# Altium PCB ignore_testboard.PcbDoc (part 1 of 2)
Units mm, origin at the board's own origin, x right, y up, seen from the top; angles counter-clockwise.
Board outline 90 x 50 mm, 2 copper layers (Top Layer, Bottom Layer); 147 components, 148 nets, 497 pads, 0 vias.
Unrouted connection lines stored in the file: 235.
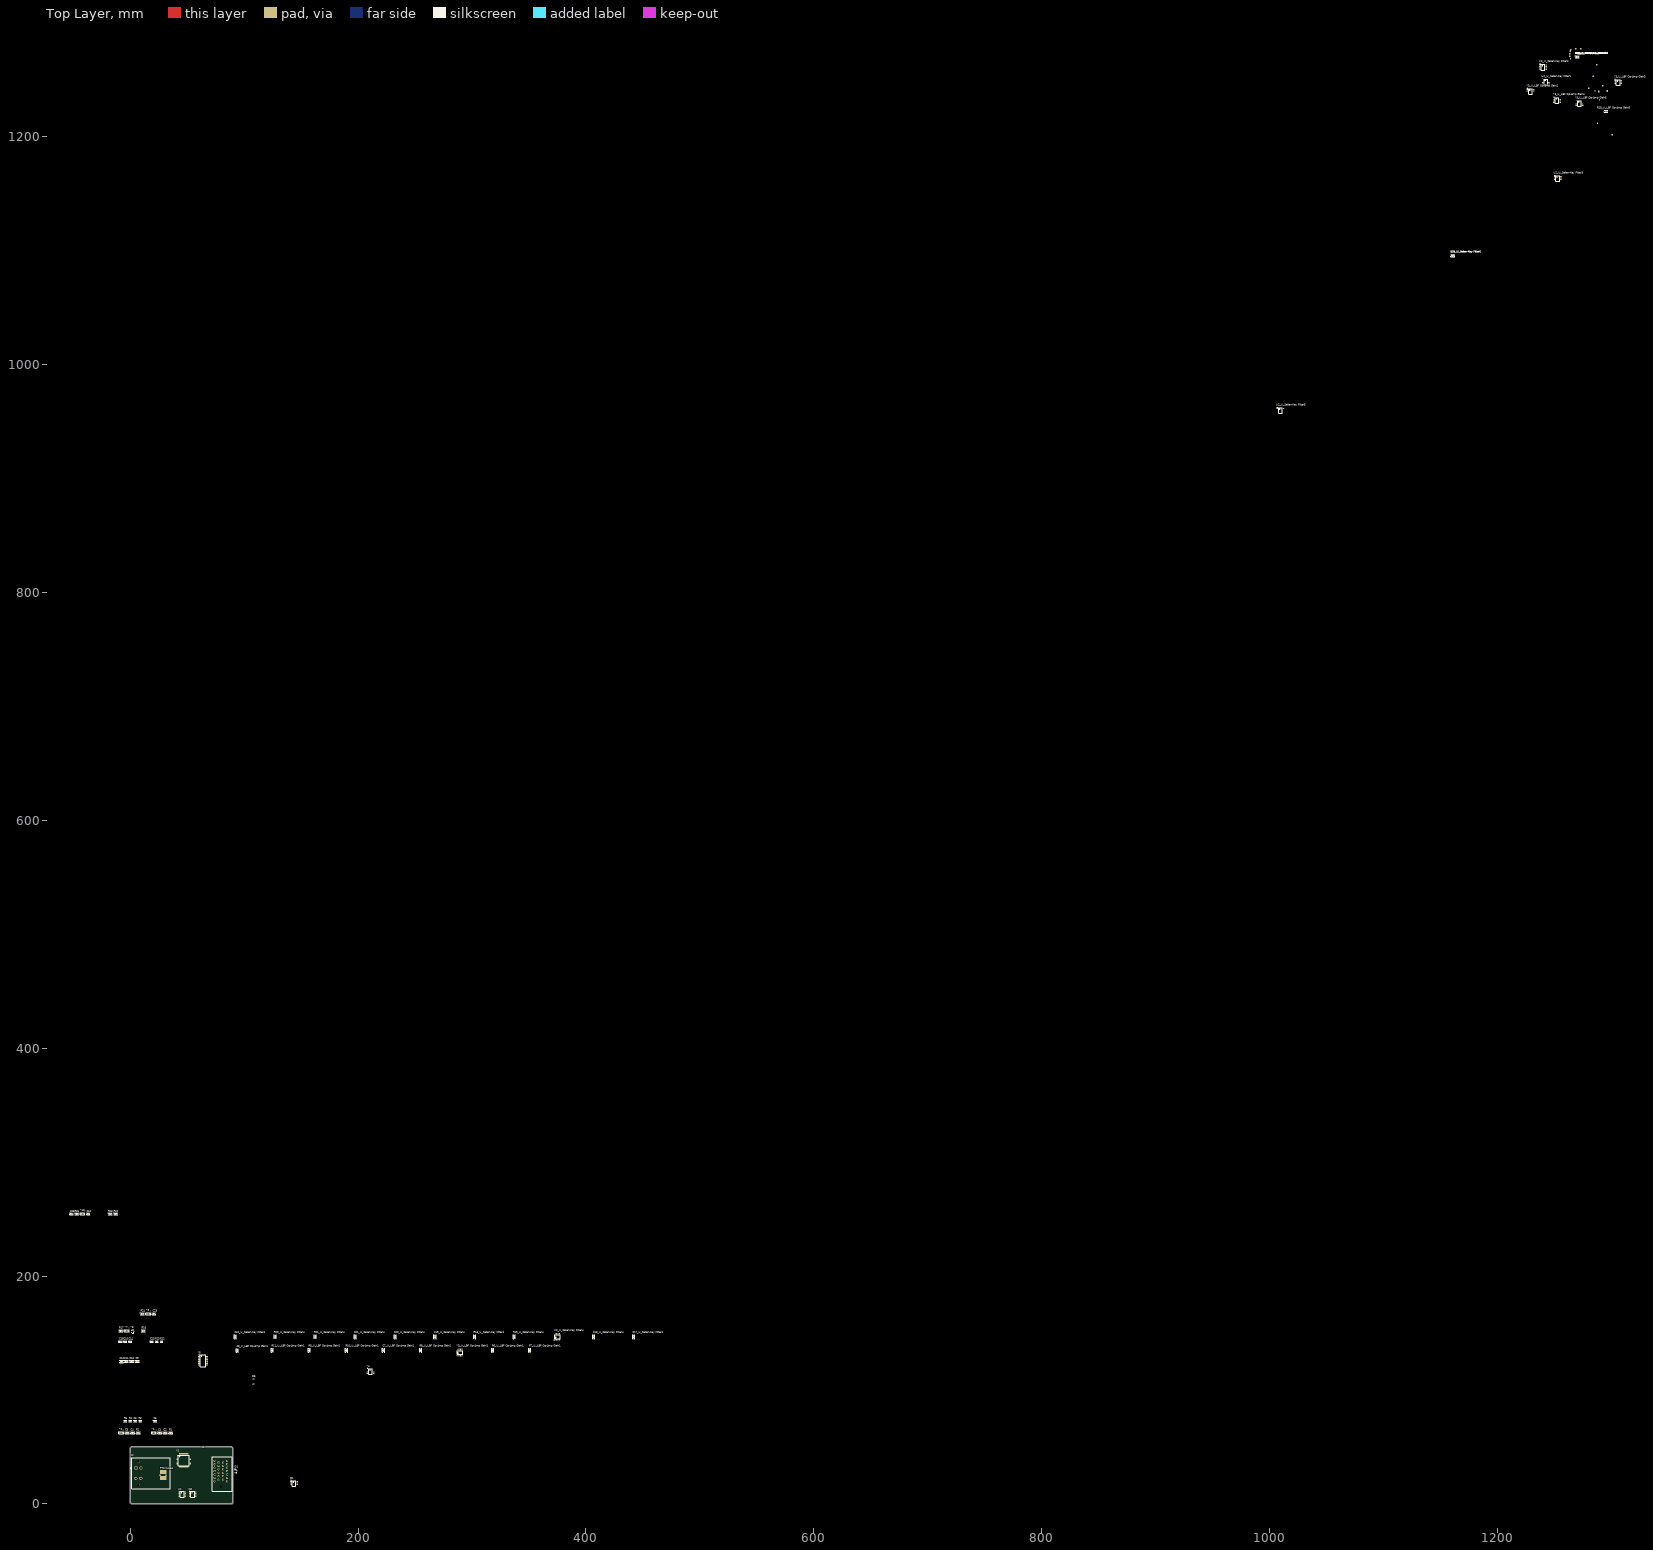
[diagram p0: Top Layer view]
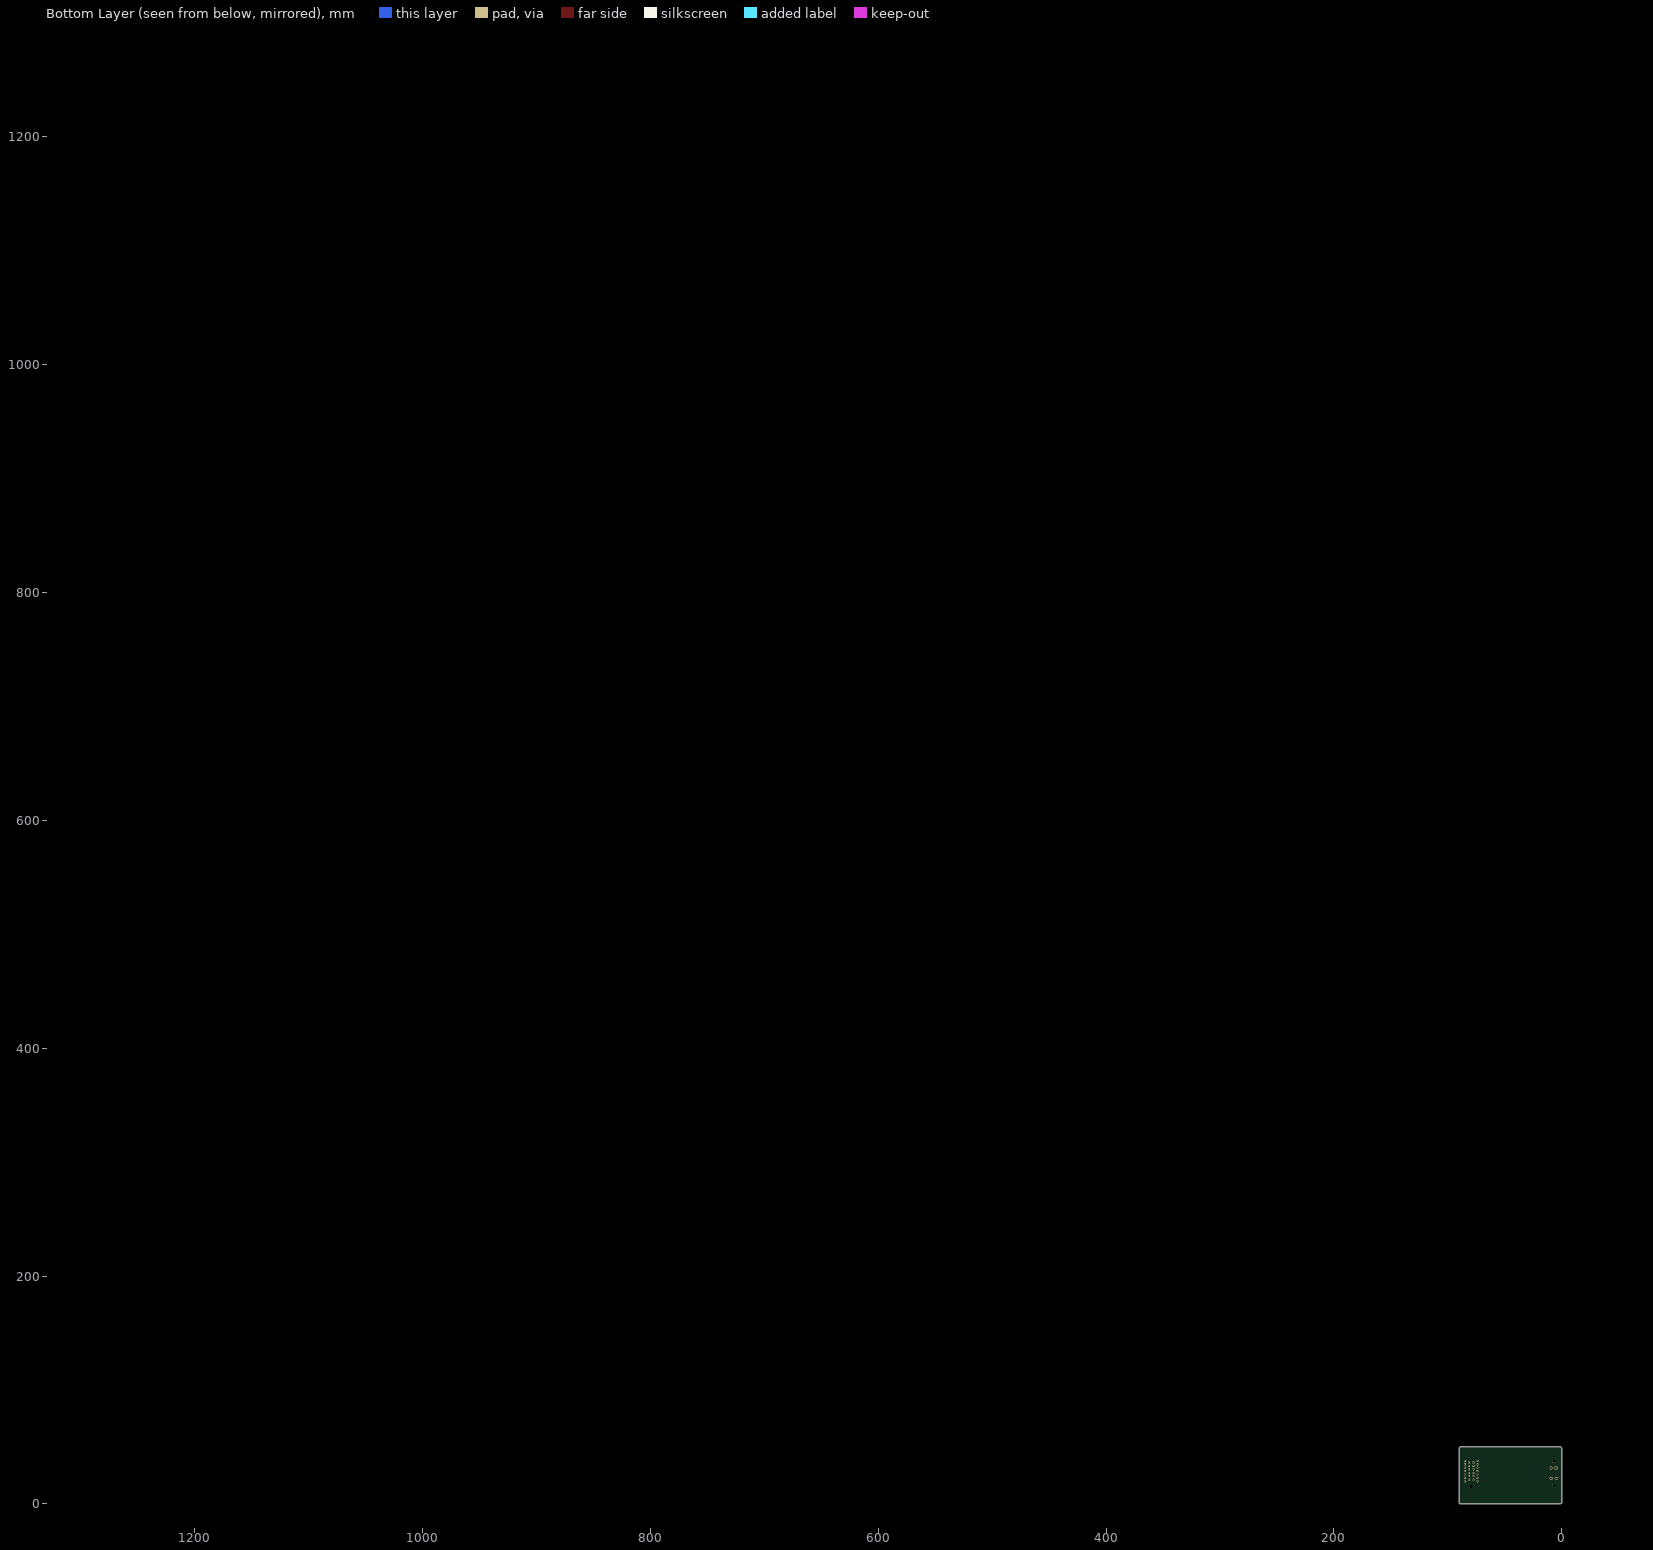
[diagram p1: Bottom Layer view, seen from below]

## Layer stack, top to bottom
Top Solder: solder mask 0.0102, Solder Resist, Dk 3.5
Top Layer: signal copper 0.0356
Dielectric 1: dielectric 0.32, FR-4, Dk 4.8
Bottom Layer: signal copper 0.0356
Bottom Solder: solder mask 0.0102, Solder Resist, Dk 3.5

## Board outline
90,49 89,50 1,50 0,49 0,1 1,0 89,0 90,1

## Design rules (kind name [scope] priority, off if disabled: settings)
Clearance [All] p1: gap=0.254 ignorepadtopadclearanceinfootprint=FALSE except(0: Arc-Hole Track-Hole SMDPad-Hole THPad-Hole Via-Hole Fill-Hole Poly-Hole Region-Hole Text-Hole)
PolygonConnect [All] p1: connectstyle=Relief reliefconductorwidth=0.254 reliefentries=4 polygonreliefangle="90 Angle" airgapwidth=0.254
RoomDefinition U_USB [InComponentClass('U_USB')] p1: confinementstyle=ConfineIn formatcopy=TRUE lockcomponents=FALSE outline 0,87.765 50.8,87.765 50.8,113.165 0,113.165
RoomDefinition U_RVP_OVP_LC [InComponentClass('U_RVP_OVP_LC')] p2: confinementstyle=ConfineIn formatcopy=TRUE lockcomponents=FALSE outline 0,0 50.8,0 50.8,25.4 0,25.4
RoomDefinition U_MCU_MKE185F512VLH16 [InComponentClass('U_MCU_MKE185F512VLH16')] p3: confinementstyle=ConfineIn formatcopy=TRUE lockcomponents=FALSE outline 0,0 50.8,0 50.8,25.4 0,25.4
RoomDefinition U_MAX680_10V_Converter [InComponentClass('U_MAX680_10V_Converter')] p4: confinementstyle=ConfineIn formatcopy=TRUE lockcomponents=FALSE outline 0,0 50.8,0 50.8,25.4 0,25.4
RoomDefinition "U_Sallen-Key Filter5" [InComponentClass('U_Sallen-Key Filter5')] p5: confinementstyle=ConfineIn formatcopy=TRUE lockcomponents=FALSE outline 1156.335,1092.71 1190.535,1092.71 1190.535,1101.91 1156.335,1101.91
RoomDefinition "U_Sallen-Key Filter4" [InComponentClass('U_Sallen-Key Filter4')] p6: confinementstyle=ConfineIn formatcopy=TRUE lockcomponents=FALSE outline 91.1,141 474.899,141 474.899,151.8 91.1,151.8
RoomDefinition "U_Sallen-Key Filter3" [InComponentClass('U_Sallen-Key Filter3')] p7: confinementstyle=ConfineIn formatcopy=TRUE lockcomponents=FALSE outline 1265.597,1266.997 1299.797,1266.997 1299.797,1276.197 1265.597,1276.197
RoomDefinition "U_Sallen-Key Filter2" [InComponentClass('U_Sallen-Key Filter2')] p8: confinementstyle=ConfineIn formatcopy=TRUE lockcomponents=FALSE outline 1265.597,1266.997 1299.797,1266.997 1299.797,1276.197 1265.597,1276.197
RoomDefinition "U_Sallen-Key Filter1" [InComponentClass('U_Sallen-Key Filter1')] p9: confinementstyle=ConfineIn formatcopy=TRUE lockcomponents=FALSE outline 1265.597,1266.997 1299.297,1266.997 1299.297,1276.197 1265.597,1276.197
RoomDefinition "U_LBF Op-Amp Gain5" [InComponentClass('U_LBF Op-Amp Gain5')] p10: confinementstyle=ConfineIn formatcopy=TRUE lockcomponents=FALSE outline 1265.597,1266.997 1297.697,1266.997 1297.697,1276.197 1265.597,1276.197
RoomDefinition "U_LBF Op-Amp Gain4" [InComponentClass('U_LBF Op-Amp Gain4')] p11: confinementstyle=ConfineIn formatcopy=TRUE lockcomponents=FALSE outline 1265.597,1266.997 1297.697,1266.997 1297.697,1276.197 1265.597,1276.197
RoomDefinition "U_LBF Op-Amp Gain3" [InComponentClass('U_LBF Op-Amp Gain3')] p12: confinementstyle=ConfineIn formatcopy=TRUE lockcomponents=FALSE outline 1265.597,1266.997 1297.697,1266.997 1297.697,1276.197 1265.597,1276.197
RoomDefinition "U_LBF Op-Amp Gain2" [InComponentClass('U_LBF Op-Amp Gain2')] p13: confinementstyle=ConfineIn formatcopy=TRUE lockcomponents=FALSE outline 1265.597,1266.997 1297.697,1266.997 1297.697,1276.197 1265.597,1276.197
RoomDefinition "U_LBF Op-Amp Gain1" [InComponentClass('U_LBF Op-Amp Gain1')] p14: confinementstyle=ConfineIn formatcopy=TRUE lockcomponents=FALSE outline 91.1,128.9 381.199,128.9 381.199,139.8 91.1,139.8
RoomDefinition U_Connectors [InComponentClass('U_Connectors')] p15: confinementstyle=ConfineIn formatcopy=TRUE lockcomponents=FALSE outline 91.2,34.8 157.4,34.8 157.4,76.7 91.2,76.7
RoomDefinition U_CAN_Tranceiver [InComponentClass('U_CAN_Tranceiver')] p16: confinementstyle=ConfineIn formatcopy=TRUE lockcomponents=FALSE outline 91.1,18.7 139,18.7 139,127.7 91.1,127.7
RoomDefinition "U_5V Reference" [InComponentClass('U_5V Reference')] p17: confinementstyle=ConfineIn formatcopy=TRUE lockcomponents=FALSE outline 91.1,14.8 147.7,14.8 147.7,127.7 91.1,127.7
RoomDefinition TopLevel [InComponentClass('TopLevel')] p18: confinementstyle=ConfineIn formatcopy=TRUE lockcomponents=FALSE outline 92.3,0 104.8,0 104.8,12.2 92.3,12.2
RoutingVias [All] p1: holewidth=0.711 width=1.27 viastyle="Through Hole" minholewidth=0.711 minwidth=1.27 maxholewidth=0.711 maxwidth=1.27
SolderMaskExpansion [All] p1: expansion=0.102
Width [All] p1: maxlimit=0.254 minlimit=0.254 preferedwidth=0.254
30 further rules are at their usual default settings.

## Classes and differential pairs
channel class "Sallen-Key Filter": "U_Sallen-Key Filter1" "U_Sallen-Key Filter2" "U_Sallen-Key Filter3" "U_Sallen-Key Filter4" "U_Sallen-Key Filter5"
channel class "LBF Op-Amp Gain": "U_LBF Op-Amp Gain1" "U_LBF Op-Amp Gain2" "U_LBF Op-Amp Gain3" "U_LBF Op-Amp Gain4" "U_LBF Op-Amp Gain5"
component class U_USB: *8 *9 *10 C23 C24 C25 J? R22 R23 R24 R25
component class "U_Sallen-Key Filter5": "C17_U_Sallen-Key Filter5" "C18_U_Sallen-Key Filter5" "C19_U_Sallen-Key Filter5" "C20_U_Sallen-Key Filter5" "C21_U_Sallen-Key Filter5" "C22_U_Sallen-Key Filter5" "R18_U_Sallen-Key Filter5" "R19_U_Sallen-Key Filter5" "R20_U_Sallen-Key Filter5" "R21_U_Sallen-Key Filter5" "U2_U_Sallen-Key Filter5"
component class "U_Sallen-Key Filter4": "C17_U_Sallen-Key Filter4" "C18_U_Sallen-Key Filter4" "C19_U_Sallen-Key Filter4" "C20_U_Sallen-Key Filter4" "C21_U_Sallen-Key Filter4" "C22_U_Sallen-Key Filter4" "R18_U_Sallen-Key Filter4" "R19_U_Sallen-Key Filter4" "R20_U_Sallen-Key Filter4" "R21_U_Sallen-Key Filter4" "U2_U_Sallen-Key Filter4"
component class "U_Sallen-Key Filter3": "C17_U_Sallen-Key Filter3" "C18_U_Sallen-Key Filter3" "C19_U_Sallen-Key Filter3" "C20_U_Sallen-Key Filter3" "C21_U_Sallen-Key Filter3" "C22_U_Sallen-Key Filter3" "R18_U_Sallen-Key Filter3" "R19_U_Sallen-Key Filter3" "R20_U_Sallen-Key Filter3" "R21_U_Sallen-Key Filter3" "U2_U_Sallen-Key Filter3"
component class "U_Sallen-Key Filter2": "C17_U_Sallen-Key Filter2" "C18_U_Sallen-Key Filter2" "C19_U_Sallen-Key Filter2" "C20_U_Sallen-Key Filter2" "C21_U_Sallen-Key Filter2" "C22_U_Sallen-Key Filter2" "R18_U_Sallen-Key Filter2" "R19_U_Sallen-Key Filter2" "R20_U_Sallen-Key Filter2" "R21_U_Sallen-Key Filter2" "U2_U_Sallen-Key Filter2"
component class "U_Sallen-Key Filter1": "C17_U_Sallen-Key Filter1" "C18_U_Sallen-Key Filter1" "C19_U_Sallen-Key Filter1" "C20_U_Sallen-Key Filter1" "C21_U_Sallen-Key Filter1" "C22_U_Sallen-Key Filter1" "R18_U_Sallen-Key Filter1" "R19_U_Sallen-Key Filter1" "R20_U_Sallen-Key Filter1" "R21_U_Sallen-Key Filter1" "U2_U_Sallen-Key Filter1"
component class U_RVP_OVP_LC: *6 *7 D5 R16 R17
component class U_MCU_MKE185F512VLH16: *5 C13 C14 C15 C16 P? R12 R13
component class U_MAX680_10V_Converter: *4 C9 C10 C11 C12
component class "U_LBF Op-Amp Gain5": "*3_U_LBF Op-Amp Gain5" "C7_U_LBF Op-Amp Gain5" "C8_U_LBF Op-Amp Gain5" "R6_U_LBF Op-Amp Gain5" "R7_U_LBF Op-Amp Gain5" "R8_U_LBF Op-Amp Gain5" "R9_U_LBF Op-Amp Gain5" "R10_U_LBF Op-Amp Gain5" "R11_U_LBF Op-Amp Gain5"
component class "U_LBF Op-Amp Gain4": "*3_U_LBF Op-Amp Gain4" "C7_U_LBF Op-Amp Gain4" "C8_U_LBF Op-Amp Gain4" "R6_U_LBF Op-Amp Gain4" "R7_U_LBF Op-Amp Gain4" "R8_U_LBF Op-Amp Gain4" "R9_U_LBF Op-Amp Gain4" "R10_U_LBF Op-Amp Gain4" "R11_U_LBF Op-Amp Gain4"
component class "U_LBF Op-Amp Gain3": "*3_U_LBF Op-Amp Gain3" "C7_U_LBF Op-Amp Gain3" "C8_U_LBF Op-Amp Gain3" "R6_U_LBF Op-Amp Gain3" "R7_U_LBF Op-Amp Gain3" "R8_U_LBF Op-Amp Gain3" "R9_U_LBF Op-Amp Gain3" "R10_U_LBF Op-Amp Gain3" "R11_U_LBF Op-Amp Gain3"
component class "U_LBF Op-Amp Gain2": "*3_U_LBF Op-Amp Gain2" "C7_U_LBF Op-Amp Gain2" "C8_U_LBF Op-Amp Gain2" "R6_U_LBF Op-Amp Gain2" "R7_U_LBF Op-Amp Gain2" "R8_U_LBF Op-Amp Gain2" "R9_U_LBF Op-Amp Gain2" "R10_U_LBF Op-Amp Gain2" "R11_U_LBF Op-Amp Gain2"
component class "U_LBF Op-Amp Gain1": "*3_U_LBF Op-Amp Gain1" "C7_U_LBF Op-Amp Gain1" "C8_U_LBF Op-Amp Gain1" "R6_U_LBF Op-Amp Gain1" "R7_U_LBF Op-Amp Gain1" "R8_U_LBF Op-Amp Gain1" "R9_U_LBF Op-Amp Gain1" "R10_U_LBF Op-Amp Gain1" "R11_U_LBF Op-Amp Gain1"
component class U_Connectors: X1 X2
component class U_CAN_Tranceiver: C5 C6 D1 R3 R4 R5 U1
component class "U_5V Reference": *1 *2 C1 C2 C3 C4 IC1 IC2 R1 R2
component class TopLevel: "PTC Fuse1"

## Components (designator, comment, footprint, x,y, rotation, side; value= is the part's Value field where it differs from the comment)
*1 "LED" 0805_LED 20.775,62.5 r0 top value=Green
*2 "LED" 0805_LED -7.925,62.5 r0 top value=Green
"*3_U_LBF Op-Amp Gain1" "LT1057IS8#PBF" SOIC-8 289.299,132.8 r90 top (schematic designator *3)
"*3_U_LBF Op-Amp Gain2" "LT1057IS8#PBF" SOIC-8 1229,1239.6 r0 top (schematic designator *3)
"*3_U_LBF Op-Amp Gain3" "LT1057IS8#PBF" SOIC-8 1306,1247.465 r0 top (schematic designator *3)
"*3_U_LBF Op-Amp Gain4" "LT1057IS8#PBF" SOIC-8 1252.4,1231.9 r0 top (schematic designator *3)
"*3_U_LBF Op-Amp Gain5" "LT1057IS8#PBF" SOIC-8 1271.9,1229.2 r0 top (schematic designator *3)
*4 "Null" SOIC-8 210.975,116.295 r0 top value=10V
*5 "MKE18F512 VLH16 MCU" TQFP64 47,38.2 r0 top
*6 "SI3434-TP" SOT23-3 2.275,151.4 r0 top value=N_Channel
*7 "LED" 0805_LED -3.125,152 r0 top value=Green
*8 "FT232RL" SSOP-28 63.875,125.662 r0 top
*9 "LED" 0805_LED 15.875,166.7 r0 top value=Green
*10 "LED" 0805_LED -41.8,254.465 r0 top value=Red
C1 "Capacitor MLCC 2.2uf 25V CAP 0805/2012" "CAP 0805/2012"#1 25.975,62.6 r0 top value=2.2uf
C2 "Capacitor MLCC 2.2uf 25V CAP 0805/2012" "CAP 0805/2012"#1 30.775,62.6 r0 top value=2.2uf
C3 "Capacitor MLCC 2.2uf 25V CAP 0805/2012" "CAP 0805/2012"#1 -2.725,62.6 r0 top value=2.2uf
C4 "Capacitor MLCC 2.2uf 25V CAP 0805/2012" "CAP 0805/2012"#1 2.075,62.6 r0 top value=2.2uf
C5 "Capacitor MLCC 0.10uf 50V CAP 0603/1608" "CAP 0603/1608" 21.775,72.7 r0 top value=0.10uf
C6 "Capacitor MLCC 4700pf 50V CAP 0603/1608" "CAP 0603/1608" 4.475,72.7 r0 top value=4700pf
"C7_U_LBF Op-Amp Gain1" "Capacitor MLCC 0.047uf 16V CAP 0805/2012" "CAP 0805/2012"#1 222.3,134.8 r90 top value=0.047uf (schematic designator C7)
"C7_U_LBF Op-Amp Gain2" "Capacitor MLCC 0.047uf 16V CAP 0805/2012" "CAP 0805/2012"#1 1269.987,1269.987 r0 top value=0.047uf (schematic designator C7)
"C7_U_LBF Op-Amp Gain3" "Capacitor MLCC 0.047uf 16V CAP 0805/2012" "CAP 0805/2012"#1 1269.987,1269.987 r0 top value=0.047uf (schematic designator C7)
"C7_U_LBF Op-Amp Gain4" "Capacitor MLCC 0.047uf 16V CAP 0805/2012" "CAP 0805/2012"#1 1269.987,1269.987 r0 top value=0.047uf (schematic designator C7)
"C7_U_LBF Op-Amp Gain5" "Capacitor MLCC 0.047uf 16V CAP 0805/2012" "CAP 0805/2012"#2 1269.987,1269.987 r0 top value=0.047uf (schematic designator C7)
"C8_U_LBF Op-Amp Gain1" "Capacitor MLCC 0.047uf 16V CAP 0805/2012" "CAP 0805/2012"#1 94,134.6 r90 top value=0.047uf (schematic designator C8)
"C8_U_LBF Op-Amp Gain2" "Capacitor MLCC 0.047uf 16V CAP 0805/2012" "CAP 0805/2012"#1 1269.987,1269.987 r0 top value=0.047uf (schematic designator C8)
"C8_U_LBF Op-Amp Gain3" "Capacitor MLCC 0.047uf 16V CAP 0805/2012" "CAP 0805/2012"#1 1269.987,1269.987 r0 top value=0.047uf (schematic designator C8)
"C8_U_LBF Op-Amp Gain4" "Capacitor MLCC 0.047uf 16V CAP 0805/2012" "CAP 0805/2012"#1 1269.987,1269.987 r0 top value=0.047uf (schematic designator C8)
"C8_U_LBF Op-Amp Gain5" "Capacitor MLCC 0.047uf 16V CAP 0805/2012" "CAP 0805/2012"#3 1269.987,1269.987 r0 top value=0.047uf (schematic designator C8)
C9 "Capacitor MLCC 4.7uf 16V CAP 0805/2012" "CAP 0805/2012"#1 6.175,125.2 r0 top value=4.7uf
C10 "Capacitor MLCC 4.7uf 16V CAP 0805/2012" "CAP 0805/2012"#1 1.275,125.2 r0 top value=4.7uf
C11 "Capacitor MLCC 4.7uf 16V CAP 0805/2012" "CAP 0805/2012"#1 -3.525,125.2 r0 top value=4.7uf
C12 "Capacitor MLCC 4.7uf 16V CAP 0805/2012" "CAP 0805/2012"#1 -7.725,125 r0 top value=4.7uf
C13 "Capacitor MLCC 0.10uf 16V CAP 0603/1608" "CAP 0603/1608" 18.975,142.5 r0 top value=0.10uf
C14 "Capacitor MLCC 0.10uf 25V CAP 0603/1608" "CAP 0603/1608" -0.025,142.5 r0 top value=0.10uf
C15 "Capacitor MLCC 100pf 25V CAP 0603/1608" "CAP 0603/1608" -4.325,142.5 r0 top value=100pf
C16 "Capacitor MLCC 0.10uf 25V CAP 0603/1608" "CAP 0603/1608" -8.625,142.5 r0 top value=0.10uf
"C17_U_Sallen-Key Filter1" "Capacitor MLCC 0.10uf 25V CAP 0805/2012" "CAP 0805/2012"#1 1269.987,1269.987 r0 top value=0.10uf (schematic designator C17)
"C17_U_Sallen-Key Filter2" "Capacitor MLCC 0.10uf 25V CAP 0805/2012" "CAP 0805/2012"#1 1269.987,1269.987 r0 top value=0.10uf (schematic designator C17)
"C17_U_Sallen-Key Filter3" "Capacitor MLCC 0.10uf 25V CAP 0805/2012" "CAP 0805/2012"#1 1269.987,1269.987 r0 top value=0.10uf (schematic designator C17)
"C17_U_Sallen-Key Filter4" "Capacitor MLCC 0.10uf 25V CAP 0805/2012" "CAP 0805/2012"#1 441.899,146.8 r90 top value=0.10uf (schematic designator C17)
"C17_U_Sallen-Key Filter5" "Capacitor MLCC 0.10uf 25V CAP 0805/2012" "CAP 0805/2012"#1 1160.725,1095.7 r0 top value=0.10uf (schematic designator C17)
"C18_U_Sallen-Key Filter1" "Capacitor MLCC 0.10uf 25V CAP 0805/2012" "CAP 0805/2012"#1 1269.987,1269.987 r0 top value=0.10uf (schematic designator C18)
"C18_U_Sallen-Key Filter2" "Capacitor MLCC 0.10uf 25V CAP 0805/2012" "CAP 0805/2012"#1 1269.987,1269.987 r0 top value=0.10uf (schematic designator C18)
"C18_U_Sallen-Key Filter3" "Capacitor MLCC 0.10uf 25V CAP 0805/2012" "CAP 0805/2012"#1 1269.987,1269.987 r0 top value=0.10uf (schematic designator C18)
"C18_U_Sallen-Key Filter4" "Capacitor MLCC 0.10uf 25V CAP 0805/2012" "CAP 0805/2012"#1 406.899,146.8 r90 top value=0.10uf (schematic designator C18)
"C18_U_Sallen-Key Filter5" "Capacitor MLCC 0.10uf 25V CAP 0805/2012" "CAP 0805/2012"#1 1160.725,1095.7 r0 top value=0.10uf (schematic designator C18)
"C19_U_Sallen-Key Filter1" "Capacitor MLCC 2200pf 25V CAP 0805/2012" "CAP 0805/2012"#1 1269.987,1269.987 r0 top value=2200pf (schematic designator C19)
"C19_U_Sallen-Key Filter2" "Capacitor MLCC 2200pf 25V CAP 0805/2012" "CAP 0805/2012"#1 1269.987,1269.987 r0 top value=2200pf (schematic designator C19)
"C19_U_Sallen-Key Filter3" "Capacitor MLCC 2200pf 25V CAP 0805/2012" "CAP 0805/2012"#1 1269.987,1269.987 r0 top value=2200pf (schematic designator C19)
"C19_U_Sallen-Key Filter4" "Capacitor MLCC 2200pf 25V CAP 0805/2012" "CAP 0805/2012"#1 267.499,146.8 r90 top value=2200pf (schematic designator C19)
"C19_U_Sallen-Key Filter5" "Capacitor MLCC 2200pf 25V CAP 0805/2012" "CAP 0805/2012"#1 1160.725,1095.7 r0 top value=2200pf (schematic designator C19)
"C20_U_Sallen-Key Filter1" "Capacitor MLCC 0.10uf 25V CAP 0805/2012" "CAP 0805/2012"#1 1269.987,1269.987 r0 top value=0.10uf (schematic designator C20)
"C20_U_Sallen-Key Filter2" "Capacitor MLCC 0.10uf 25V CAP 0805/2012" "CAP 0805/2012"#1 1269.987,1269.987 r0 top value=0.10uf (schematic designator C20)
"C20_U_Sallen-Key Filter3" "Capacitor MLCC 0.10uf 25V CAP 0805/2012" "CAP 0805/2012"#1 1269.987,1269.987 r0 top value=0.10uf (schematic designator C20)
"C20_U_Sallen-Key Filter4" "Capacitor MLCC 0.10uf 25V CAP 0805/2012" "CAP 0805/2012"#1 232.5,146.8 r90 top value=0.10uf (schematic designator C20)
"C20_U_Sallen-Key Filter5" "Capacitor MLCC 0.10uf 25V CAP 0805/2012" "CAP 0805/2012"#1 1160.725,1095.7 r0 top value=0.10uf (schematic designator C20)
"C21_U_Sallen-Key Filter1" "Capacitor MLCC 0.10uf 25V CAP 0805/2012" "CAP 0805/2012"#1 1269.987,1269.987 r0 top value=0.10uf (schematic designator C21)
"C21_U_Sallen-Key Filter2" "Capacitor MLCC 0.10uf 25V CAP 0805/2012" "CAP 0805/2012"#1 1269.987,1269.987 r0 top value=0.10uf (schematic designator C21)
"C21_U_Sallen-Key Filter3" "Capacitor MLCC 0.10uf 25V CAP 0805/2012" "CAP 0805/2012"#1 1269.987,1269.987 r0 top value=0.10uf (schematic designator C21)
"C21_U_Sallen-Key Filter4" "Capacitor MLCC 0.10uf 25V CAP 0805/2012" "CAP 0805/2012"#1 197.4,146.8 r90 top value=0.10uf (schematic designator C21)
"C21_U_Sallen-Key Filter5" "Capacitor MLCC 0.10uf 25V CAP 0805/2012" "CAP 0805/2012"#1 1160.725,1095.7 r0 top value=0.10uf (schematic designator C21)
"C22_U_Sallen-Key Filter1" "Capacitor MLCC 2200pf 25V CAP 0805/2012" "CAP 0805/2012"#1 1269.987,1269.987 r0 top value=2200pf (schematic designator C22)
"C22_U_Sallen-Key Filter2" "Capacitor MLCC 2200pf 25V CAP 0805/2012" "CAP 0805/2012"#1 1269.987,1269.987 r0 top value=2200pf (schematic designator C22)
"C22_U_Sallen-Key Filter3" "Capacitor MLCC 2200pf 25V CAP 0805/2012" "CAP 0805/2012"#1 1269.987,1269.987 r0 top value=2200pf (schematic designator C22)
"C22_U_Sallen-Key Filter4" "Capacitor MLCC 2200pf 25V CAP 0805/2012" "CAP 0805/2012"#1 92.3,146.8 r90 top value=2200pf (schematic designator C22)
"C22_U_Sallen-Key Filter5" "Capacitor MLCC 2200pf 25V CAP 0805/2012" "CAP 0805/2012"#1 1160.725,1095.7 r0 top value=2200pf (schematic designator C22)
C23 "Capacitor MLCC 0.10uf 25V CAP 0603/1608" "CAP 0603/1608" 20.775,166.9 r0 top value=0.10uf
C24 "Capacitor MLCC 0.10uf 25V CAP 0603/1608" "CAP 0603/1608" -36.9,254.665 r0 top value=0.10uf
C25 "Capacitor MLCC 0.10uf 25V CAP 0603/1608" "CAP 0603/1608" -51.6,254.665 r0 top value=0.10uf
D1 "NUP1105LT1G" "SOT-23 (TO-236)" 92.9,28.7 r0 top value=TVS_24V
D5 "DIODE" SOD-128 108.3,107.5 r90 top value=5A
IC1 "MAX6350CSA+ 5V" SOIC-8 143.8,17.8 r0 top value=5V
IC2 "MAX6350CSA+ 5V" SOIC-8 54.8,8.4 r0 top value=5V
"PTC Fuse1" "PTC Fuse" "PTC Fuse 2920/07351" 28.9,25.2 r90 top value="2A hold, 4A trip, 40A max"
R1 "Resistor 470 0805 1/10W 1%" "RES 0805/2012"#1 35.575,62.6 r0 top value=470
R2 "Resistor 470 0805 1/10W 1%" "RES 0805/2012"#1 6.875,62.6 r0 top value=470
R3 "Resistor 62 0603 1/10W 5%" "RES 0603/1608" 8.675,72.7 r0 top value=62
R4 "Resistor 62 0603 1/10W 5%" "RES 0603/1608" 0.075,72.7 r0 top value=62
R5 "Resistor 100 0603 1/10W 10%" "RES 0603/1608" -4.325,72.7 r0 top value=100
"R6_U_LBF Op-Amp Gain1" "Resistor 2.2k 0805 1/10W 1%" "RES 0805/2012"#1 318.299,134.8 r90 top value=2.2k (schematic designator R6)
"R6_U_LBF Op-Amp Gain2" "Resistor 2.2k 0805 1/10W 1%" "RES 0805/2012"#1 1269.987,1269.987 r0 top value=2.2k (schematic designator R6)
"R6_U_LBF Op-Amp Gain3" "Resistor 2.2k 0805 1/10W 1%" "RES 0805/2012"#1 1269.987,1269.987 r0 top value=2.2k (schematic designator R6)
"R6_U_LBF Op-Amp Gain4" "Resistor 2.2k 0805 1/10W 1%" "RES 0805/2012"#1 1269.987,1269.987 r0 top value=2.2k (schematic designator R6)
"R6_U_LBF Op-Amp Gain5" "Resistor 2.2k 0805 1/10W 1%" "RES 0805/2012"#2 1269.987,1269.987 r0 top value=2.2k (schematic designator R6)
"R7_U_LBF Op-Amp Gain1" "Resistor 2.2k 0805 1/10W 1%" "RES 0805/2012"#1 350.799,134.8 r90 top value=2.2k (schematic designator R7)
"R7_U_LBF Op-Amp Gain2" "Resistor 2.2k 0805 1/10W 1%" "RES 0805/2012"#1 1269.987,1269.987 r0 top value=2.2k (schematic designator R7)
"R7_U_LBF Op-Amp Gain3" "Resistor 2.2k 0805 1/10W 1%" "RES 0805/2012"#1 1269.987,1269.987 r0 top value=2.2k (schematic designator R7)
"R7_U_LBF Op-Amp Gain4" "Resistor 2.2k 0805 1/10W 1%" "RES 0805/2012"#1 1269.987,1269.987 r0 top value=2.2k (schematic designator R7)
"R7_U_LBF Op-Amp Gain5" "Resistor 2.2k 0805 1/10W 1%" "RES 0805/2012"#3 1269.987,1269.987 r0 top value=2.2k (schematic designator R7)
"R8_U_LBF Op-Amp Gain1" "Resistor 2.2k 0805 1/10W 1%" "RES 0805/2012"#1 254.799,134.8 r90 top value=2.2k (schematic designator R8)
"R8_U_LBF Op-Amp Gain2" "Resistor 2.2k 0805 1/10W 1%" "RES 0805/2012"#1 1269.987,1269.987 r0 top value=2.2k (schematic designator R8)
"R8_U_LBF Op-Amp Gain3" "Resistor 2.2k 0805 1/10W 1%" "RES 0805/2012"#1 1269.987,1269.987 r0 top value=2.2k (schematic designator R8)
"R8_U_LBF Op-Amp Gain4" "Resistor 2.2k 0805 1/10W 1%" "RES 0805/2012"#1 1269.987,1269.987 r0 top value=2.2k (schematic designator R8)
"R8_U_LBF Op-Amp Gain5" "Resistor 2.2k 0805 1/10W 1%" "RES 0805/2012"#4 1269.987,1269.987 r0 top value=2.2k (schematic designator R8)
"R9_U_LBF Op-Amp Gain1" "Resistor 2.2k 0805 1/10W 1%" "RES 0805/2012"#1 157.3,134.8 r90 top value=2.2k (schematic designator R9)
"R9_U_LBF Op-Amp Gain2" "Resistor 2.2k 0805 1/10W 1%" "RES 0805/2012"#1 1269.987,1269.987 r0 top value=2.2k (schematic designator R9)
"R9_U_LBF Op-Amp Gain3" "Resistor 2.2k 0805 1/10W 1%" "RES 0805/2012"#1 1269.987,1269.987 r0 top value=2.2k (schematic designator R9)
"R9_U_LBF Op-Amp Gain4" "Resistor 2.2k 0805 1/10W 1%" "RES 0805/2012"#1 1269.987,1269.987 r0 top value=2.2k (schematic designator R9)
"R9_U_LBF Op-Amp Gain5" "Resistor 2.2k 0805 1/10W 1%" "RES 0805/2012"#5 1269.987,1269.987 r0 top value=2.2k (schematic designator R9)
"R10_U_LBF Op-Amp Gain1" "Resistor 2.2k 0805 1/10W 1%" "RES 0805/2012"#1 189.8,134.8 r90 top value=2.2k (schematic designator R10)
"R10_U_LBF Op-Amp Gain2" "Resistor 2.2k 0805 1/10W 1%" "RES 0805/2012"#1 1269.987,1269.987 r0 top value=2.2k (schematic designator R10)
"R10_U_LBF Op-Amp Gain3" "Resistor 2.2k 0805 1/10W 1%" "RES 0805/2012"#1 1269.987,1269.987 r0 top value=2.2k (schematic designator R10)
"R10_U_LBF Op-Amp Gain4" "Resistor 2.2k 0805 1/10W 1%" "RES 0805/2012"#6 1269.987,1269.987 r0 top value=2.2k (schematic designator R10)
"R10_U_LBF Op-Amp Gain5" "Resistor 2.2k 0805 1/10W 1%" "RES 0805/2012"#7 1295.3,1222.5 r0 top value=2.2k (schematic designator R10)
"R11_U_LBF Op-Amp Gain1" "Resistor 2.2k 0805 1/10W 1%" "RES 0805/2012"#1 124.8,134.8 r90 top value=2.2k (schematic designator R11)
"R11_U_LBF Op-Amp Gain2" "Resistor 2.2k 0805 1/10W 1%" "RES 0805/2012"#1 1269.987,1269.987 r0 top value=2.2k (schematic designator R11)
"R11_U_LBF Op-Amp Gain3" "Resistor 2.2k 0805 1/10W 1%" "RES 0805/2012"#1 1269.987,1269.987 r0 top value=2.2k (schematic designator R11)
"R11_U_LBF Op-Amp Gain4" "Resistor 2.2k 0805 1/10W 1%" "RES 0805/2012"#8 1269.987,1269.987 r0 top value=2.2k (schematic designator R11)
"R11_U_LBF Op-Amp Gain5" "Resistor 2.2k 0805 1/10W 1%" "RES 0805/2012"#9 1269.987,1269.987 r0 top value=2.2k (schematic designator R11)
R12 "Resistor 10k 0603 1/10W 1%" "RES 0603/1608" 27.475,142.5 r0 top value=10k
R13 "Resistor 10k 0603 1/10W 5%" "RES 0603/1608" 23.175,142.5 r0 top value=10k
R16 "Resistor 470 0805 1/10W 1%" "RES 0805/2012"#1 11.575,152 r0 top value=470
R17 "Resistor 47k 0805 1/10W 1%" "RES 0805/2012"#1 -8.325,152 r0 top value=47k
"R18_U_Sallen-Key Filter1" "Resistor 24k 0805 1/10W 1%" "RES 0805/2012"#1 1269.987,1269.987 r0 top value=24k (schematic designator R18)
"R18_U_Sallen-Key Filter2" "Resistor 24k 0805 1/10W 1%" "RES 0805/2012"#1 1269.987,1269.987 r0 top value=24k (schematic designator R18)
"R18_U_Sallen-Key Filter3" "Resistor 24k 0805 1/10W 1%" "RES 0805/2012"#1 1269.987,1269.987 r0 top value=24k (schematic designator R18)
"R18_U_Sallen-Key Filter4" "Resistor 24k 0805 1/10W 1%" "RES 0805/2012"#1 302.299,146.8 r90 top value=24k (schematic designator R18)
"R18_U_Sallen-Key Filter5" "Resistor 24k 0805 1/10W 1%" "RES 0805/2012"#1 1160.725,1095.7 r0 top value=24k (schematic designator R18)
"R19_U_Sallen-Key Filter1" "Resistor 9.1k 0805 1/10W 1%" "RES 0805/2012"#1 1269.987,1269.987 r0 top value=9.1k (schematic designator R19)
"R19_U_Sallen-Key Filter2" "Resistor 9.1k 0805 1/10W 1%" "RES 0805/2012"#1 1269.987,1269.987 r0 top value=9.1k (schematic designator R19)
"R19_U_Sallen-Key Filter3" "Resistor 9.1k 0805 1/10W 1%" "RES 0805/2012"#1 1269.987,1269.987 r0 top value=9.1k (schematic designator R19)
"R19_U_Sallen-Key Filter4" "Resistor 9.1k 0805 1/10W 1%" "RES 0805/2012"#1 337.099,146.8 r90 top value=9.1k (schematic designator R19)
"R19_U_Sallen-Key Filter5" "Resistor 9.1k 0805 1/10W 1%" "RES 0805/2012"#1 1160.725,1095.7 r0 top value=9.1k (schematic designator R19)
"R20_U_Sallen-Key Filter1" "Resistor 24k 0805 1/10W 1%" "RES 0805/2012"#1 1269.987,1269.987 r0 top value=24k (schematic designator R20)
"R20_U_Sallen-Key Filter2" "Resistor 24k 0805 1/10W 1%" "RES 0805/2012"#1 1269.987,1269.987 r0 top value=24k (schematic designator R20)
"R20_U_Sallen-Key Filter3" "Resistor 24k 0805 1/10W 1%" "RES 0805/2012"#1 1269.987,1269.987 r0 top value=24k (schematic designator R20)
"R20_U_Sallen-Key Filter4" "Resistor 24k 0805 1/10W 1%" "RES 0805/2012"#1 127.3,146.8 r90 top value=24k (schematic designator R20)
"R20_U_Sallen-Key Filter5" "Resistor 24k 0805 1/10W 1%" "RES 0805/2012"#1 1160.725,1095.7 r0 top value=24k (schematic designator R20)
"R21_U_Sallen-Key Filter1" "Resistor 9.1k 0805 1/10W 1%" "RES 0805/2012"#1 1269.987,1269.987 r0 top value=9.1k (schematic designator R21)
"R21_U_Sallen-Key Filter2" "Resistor 9.1k 0805 1/10W 1%" "RES 0805/2012"#1 1269.987,1269.987 r0 top value=9.1k (schematic designator R21)
"R21_U_Sallen-Key Filter3" "Resistor 9.1k 0805 1/10W 1%" "RES 0805/2012"#1 1269.987,1269.987 r0 top value=9.1k (schematic designator R21)
"R21_U_Sallen-Key Filter4" "Resistor 9.1k 0805 1/10W 1%" "RES 0805/2012"#1 162.4,146.8 r90 top value=9.1k (schematic designator R21)
"R21_U_Sallen-Key Filter5" "Resistor 9.1k 0805 1/10W 1%" "RES 0805/2012"#1 1160.725,1095.7 r0 top value=9.1k (schematic designator R21)
R22 "Resistor 1.0k 0805 1/4W 1%" "RES 0805/2012"#1 -12.8,254.465 r0 top value=1.0k
R23 "Resistor 1.0k 0805 1/4W 1%" "RES 0805/2012"#1 -17.6,254.465 r0 top value=1.0k
R24 "Resistor 1.0k 0805 1/4W 1%" "RES 0805/2012"#1 10.675,166.7 r0 top value=1.0k
R25 "Resistor 1.0k 0805 1/4W 1%" "RES 0805/2012"#1 -47,254.465 r0 top value=1.0k
U1 "MCP2561 CAN Transceiver" SOIC-8 45.7,8.4 r0 top value=CAN/UART
"U2_U_Sallen-Key Filter1" "LT1057IS8#PBF" SOIC-8 1242.5,1248.1 r0 top (schematic designator U2)
"U2_U_Sallen-Key Filter2" "LT1057IS8#PBF" SOIC-8 1240.025,1261.035 r0 top (schematic designator U2)
"U2_U_Sallen-Key Filter3" "LT1057IS8#PBF" SOIC-8 1253,1163.2 r0 top (schematic designator U2)
"U2_U_Sallen-Key Filter4" "LT1057IS8#PBF" SOIC-8 374.9,146.7 r90 top (schematic designator U2)
"U2_U_Sallen-Key Filter5" "LT1057IS8#PBF" SOIC-8 1009.51,959.675 r0 top (schematic designator U2)
X1 "6437288-6" TE_Amp_6437288-6 79.5,28.8 r0 top value=CONN
X2 "DTF13-4P" DTF13-4P 7.1,26.959 r90 top value=CONN

## Footprints (in the part's own frame and the unit in brackets; to place one, negate y for a bottom-side part, rotate by r counter-clockwise, add the part's x,y. Pads: shape width x height; smd on the part's side, far side on the other; paste and mask are expansions set on the pad)
0805_LED [mm]
  rect 1.1x1.3 smd: 1(-1.15,0) 2(1.15,0)
  silkscreen extent -2.06,-0.89 2.03,0.89, body extent -1.05,-0.67 1.05,0.68, height 0.9
"CAP 0603/1608" [mm] "Chip Capacitor, 2-Leads, Body 1.60x0.80mm, IPC Medium Density"
  rect 0.9x1 smd: 1(-0.675,0) 2(0.675,0)
  silkscreen extent -1.4,-0.7 1.4,0.7, body extent -0.8,-0.41 0.8,0.41, height 0.82
"CAP 0805/2012"#1 [mm] "Chip Capacitor, 2-Leads, Body 2.00x1.20mm, IPC Medium Density"
  rect 1.3x1.4 smd: 1(-0.8,0) 2(0.8,0)
  silkscreen extent -1.7,-0.9 1.7,0.9, body extent -1,-0.64 1,0.64, height 1.26
"CAP 0805/2012"#2 [mm] "Chip Capacitor, 2-Leads, Body 2.00x1.20mm, IPC Medium Density"
  rect 1.3x1.4 smd: 1(18.813,-30.287) 2(0.8,0)
  silkscreen extent -1.7,-0.9 1.7,0.9, body extent -1,-0.64 1,0.64, height 1.26
"CAP 0805/2012"#3 [mm] "Chip Capacitor, 2-Leads, Body 2.00x1.20mm, IPC Medium Density"
  rect 1.3x1.4 smd: 1(10.313,-27.287) 2(0.8,0)
  silkscreen extent -1.7,-0.9 1.7,0.9, body extent -1,-0.64 1,0.64, height 1.26
DTF13-4P [mm]
  rect 2.64x2.64 hole 1.76: 1(4.561,2.223)
  round 2.64 hole 1.76: 2(4.561,-2.227) 3(-4.559,-2.227) 4(-4.559,2.223)
  round 2.16 hole 2.16 unplated: None(-10.415,0) None(10.415,0)
  silkscreen extent -13.59,-27.88 13.59,6.85
"PTC Fuse 2920/07351" [mm] "Chip PTC Fuse, 2-Leads, Body 7.36x5.12mm, IPC Medium Density"
  rect 3.5x5.45 smd: 1(-2.625,0) 2(2.625,0)
  silkscreen extent -0.5,-2.62 0.5,2.63, body extent -3.99,-2.72 3.99,2.72, height 1.25
"RES 0603/1608" [mm] "Chip Resistor, 2-Leads, Body 1.60x0.80mm, IPC Medium Density"
  rect 0.85x0.95 smd: 1(-0.65,0) 2(0.65,0)
  silkscreen extent -1.27,-0.7 1.27,0.7, body extent -0.8,-0.4 0.8,0.4, height 0.45
"RES 0805/2012"#1 [mm] "Chip Resistor, 2-Leads, Body 2.00x1.25mm, IPC Medium Density"
  rect 1.15x1.35 smd: 1(-0.875,0) 2(0.875,0)
  silkscreen extent -1.7,-0.9 1.7,0.9, body extent -0.95,-0.62 1.05,0.63, height 0.6
"RES 0805/2012"#2 [mm] "Chip Resistor, 2-Leads, Body 2.00x1.25mm, IPC Medium Density"
  rect 1.15x1.35 smd: 1(-6.187,4.813) 2(14.213,-16.987)
  silkscreen extent -1.7,-0.9 1.7,0.9, body extent -0.95,-0.62 1.05,0.63, height 0.6
"RES 0805/2012"#3 [mm] "Chip Resistor, 2-Leads, Body 2.00x1.25mm, IPC Medium Density"
  rect 1.15x1.35 smd: 1(22.513,-25.387) 2(26.413,-29.887)
  silkscreen extent -1.7,-0.9 1.7,0.9, body extent -0.95,-0.62 1.05,0.63, height 0.6
"RES 0805/2012"#4 [mm] "Chip Resistor, 2-Leads, Body 2.00x1.25mm, IPC Medium Density"
  rect 1.15x1.35 smd: 1(-6.487,0.813) 2(-5.587,6.513)
  silkscreen extent -1.7,-0.9 1.7,0.9, body extent -0.95,-0.62 1.05,0.63, height 0.6
"RES 0805/2012"#5 [mm] "Chip Resistor, 2-Leads, Body 2.00x1.25mm, IPC Medium Density"
  rect 1.15x1.35 smd: 1(15.713,-29.487) 2(19.513,-37.387)
  silkscreen extent -1.7,-0.9 1.7,0.9, body extent -0.95,-0.62 1.05,0.63, height 0.6
"RES 0805/2012"#6 [mm] "Chip Resistor, 2-Leads, Body 2.00x1.25mm, IPC Medium Density"
  rect 1.15x1.35 smd: 1(-1.287,7.313) 2(0.875,0)
  silkscreen extent -1.7,-0.9 1.7,0.9, body extent -0.95,-0.62 1.05,0.63, height 0.6
"RES 0805/2012"#7 [mm] "Chip Resistor, 2-Leads, Body 2.00x1.25mm, IPC Medium Density"
  rect 1.15x1.35 smd: 1(-7.487,-10.787) 2(5.513,-20.887)
  silkscreen extent -1.7,-0.9 1.7,0.9, body extent -0.95,-0.62 1.05,0.63, height 0.6
"RES 0805/2012"#8 [mm] "Chip Resistor, 2-Leads, Body 2.00x1.25mm, IPC Medium Density"
  rect 1.15x1.35 smd: 1(-5.887,-1.387) 2(3.213,7.113)
  silkscreen extent -1.7,-0.9 1.7,0.9, body extent -0.95,-0.62 1.05,0.63, height 0.6
"RES 0805/2012"#9 [mm] "Chip Resistor, 2-Leads, Body 2.00x1.25mm, IPC Medium Density"
  rect 1.15x1.35 smd: 1(-6.387,2.813) 2(17.113,-6.687)
  silkscreen extent -1.7,-0.9 1.7,0.9, body extent -0.95,-0.62 1.05,0.63, height 0.6
SOD-128 [mm] "SOD-128, 2-Leads, Body 2.40x4.70mm, IPC Medium Density"
  rect 0.9x1.9 smd: 1(-2.175,0) 2(2.175,0)
  silkscreen extent -2.57,1.2 -2.48,1.3, body extent -2.35,-1.25 2.35,1.25, height 0.85
SOIC-8 [mm] "SOIC, 8-Leads, Body 4.90x3.90mm, Pitch 1.27mm, IPC Medium Density"
  oval 1.45x0.6 smd: 1(-2.725,1.905) 2(-2.725,0.635) 3(-2.725,-0.635) 4(-2.725,-1.905) 5(2.725,-1.905) 6(2.725,-0.635) 7(2.725,0.635) 8(2.725,1.905)
  silkscreen extent -2.85,-2.5 1.6,2.88, body extent -3,-2.5 3,2.5, height 1.75
SOT23-3 [mm] "SOT23, 3-Leads, Body 2.92x2.37mm, Pitch 0.95mm, IPC Medium Density, NUP2105L"
  rect 0.9x0.8 smd: 1(-1,0.95) 2(-1,-0.95) 3(1,0)
  silkscreen extent -1.12,-1.5 0.7,2.02, body extent -0.7,-1.52 0.7,1.52, height 1.11
"SOT-23 (TO-236)" [mm]
  rect 0.9x0.8 smd: 1(-1,0.95) 2(-1,-0.95) 3(1,0)
  silkscreen extent -1.12,-1.46 0.65,2.02, body extent -0.65,-1.46 0.65,1.46, height 1.11
SSOP-28 [mm] "SOP68P780X200-28N ,SOP, 28-Leads, Body 10.20x5.30mm, Pitch 0.68mm, IPC Medium Density, FT232RL"
  oval 1.65x0.5 smd: 1(-3.625,4.394) 2(-3.625,3.718) 3(-3.625,3.042) 4(-3.625,2.366) 5(-3.625,1.69) 6(-3.625,1.014) 7(-3.625,0.338) 8(-3.625,-0.338) 9(-3.625,-1.014) 10(-3.625,-1.69) 11(-3.625,-2.366) 12(-3.625,-3.042) 13(-3.625,-3.718) 14(-3.625,-4.394) 15(3.625,-4.394) 16(3.625,-3.718) 17(3.625,-3.042) 18(3.625,-2.366) 19(3.625,-1.69) 20(3.625,-1.014) 21(3.625,-0.338) 22(3.625,0.338) 23(3.625,1.014) 24(3.625,1.69) 25(3.625,2.366) 26(3.625,3.042) 27(3.625,3.718) 28(3.625,4.394)
  silkscreen extent -3.75,-5.25 2.4,5.32, body extent -2.8,-5.25 2.8,5.25, height 2
TE_Amp_6437288-6 [mm] "TE_Amp_6437288-6"
  round 1.8 hole 1.3: 1(5.5,9) 2(5.5,6) 3(5.5,3) 4(5.5,0) 5(5.5,-3) 6(5.5,-6) 7(5.5,-9) 8(2,7.5) 9(2,4.5) 10(2,1.5) 11(2,-1.5) 12(2,-4.5) 13(2,-7.5) 14(-2,7.5) 15(-2,4.5) 16(-2,1.5) 17(-2,-1.5) 18(-2,-4.5) 19(-2,-7.5) 20(-5.5,9) 21(-5.5,6) 22(-5.5,3) 23(-5.5,0) 24(-5.5,-3) 25(-5.5,-6) 26(-5.5,-9)
  round 0 hole 2.5: 27(0,-13.5)
  silkscreen extent -7.5,-17.5 10,12.5, body extent -16.8,-19.7 19.7,19.3, height 24.71
TQFP64 [mm] "TSQFP, 64-Leads, Body 10.00x10.00mm, Pitch 0.50mm, IPC Medium Density, MKE18F512VLH16"
  rect 1.35x0.3 smd: 1(-5.75,3.75) 2(-5.75,3.25) 3(-5.75,2.75) 4(-5.75,2.25) 5(-5.75,1.75) 6(-5.75,1.25) 7(-5.75,0.75) 8(-5.75,0.25) 9(-5.75,-0.25) 10(-5.75,-0.75) 11(-5.75,-1.25) 12(-5.75,-1.75) 13(-5.75,-2.25) 14(-5.75,-2.75) 15(-5.75,-3.25) 16(-5.75,-3.75) 33(5.75,-3.75) 34(5.75,-3.25) 35(5.75,-2.75) 36(5.75,-2.25) 37(5.75,-1.75) 38(5.75,-1.25) 39(5.75,-0.75) 40(5.75,-0.25) 41(5.75,0.25) 42(5.75,0.75) 43(5.75,1.25) 44(5.75,1.75) 45(5.75,2.25) 46(5.75,2.75) 47(5.75,3.25) 48(5.75,3.75)
  rect 0.3x1.35 smd: 17(-3.75,-5.75) 18(-3.25,-5.75) 19(-2.75,-5.75) 20(-2.25,-5.75) 21(-1.75,-5.75) 22(-1.25,-5.75) 23(-0.75,-5.75) 24(-0.25,-5.75) 25(0.25,-5.75) 26(0.75,-5.75) 27(1.25,-5.75) 28(1.75,-5.75) 29(2.25,-5.75) 30(2.75,-5.75) 31(3.25,-5.75) 32(3.75,-5.75) 49(3.75,5.75) 50(3.25,5.75) 51(2.75,5.75) 52(2.25,5.75) 53(1.75,5.75) 54(1.25,5.75) 55(0.75,5.75) 56(0.25,5.75) 57(-0.25,5.75) 58(-0.75,5.75) 59(-1.25,5.75) 60(-1.75,5.75) 61(-2.25,5.75) 62(-2.75,5.75) 63(-3.25,5.75) 64(-3.75,5.75)
  silkscreen extent -5.87,-4.67 4.67,4.68, body extent -5,-5 5,5, height 1.6